# Altium PCB PUMP_MODULE_20230110.PcbDoc (part 6 of 6)
Units mm, origin at the board's own origin, x right, y up, seen from the top; angles counter-clockwise.
Board outline 260.15 x 142.01 mm, 4 copper layers (Top Layer, Mid-Layer 1, Mid-Layer 2, Bottom Layer); 422 components, 240 nets, 1746 pads, 416 vias.
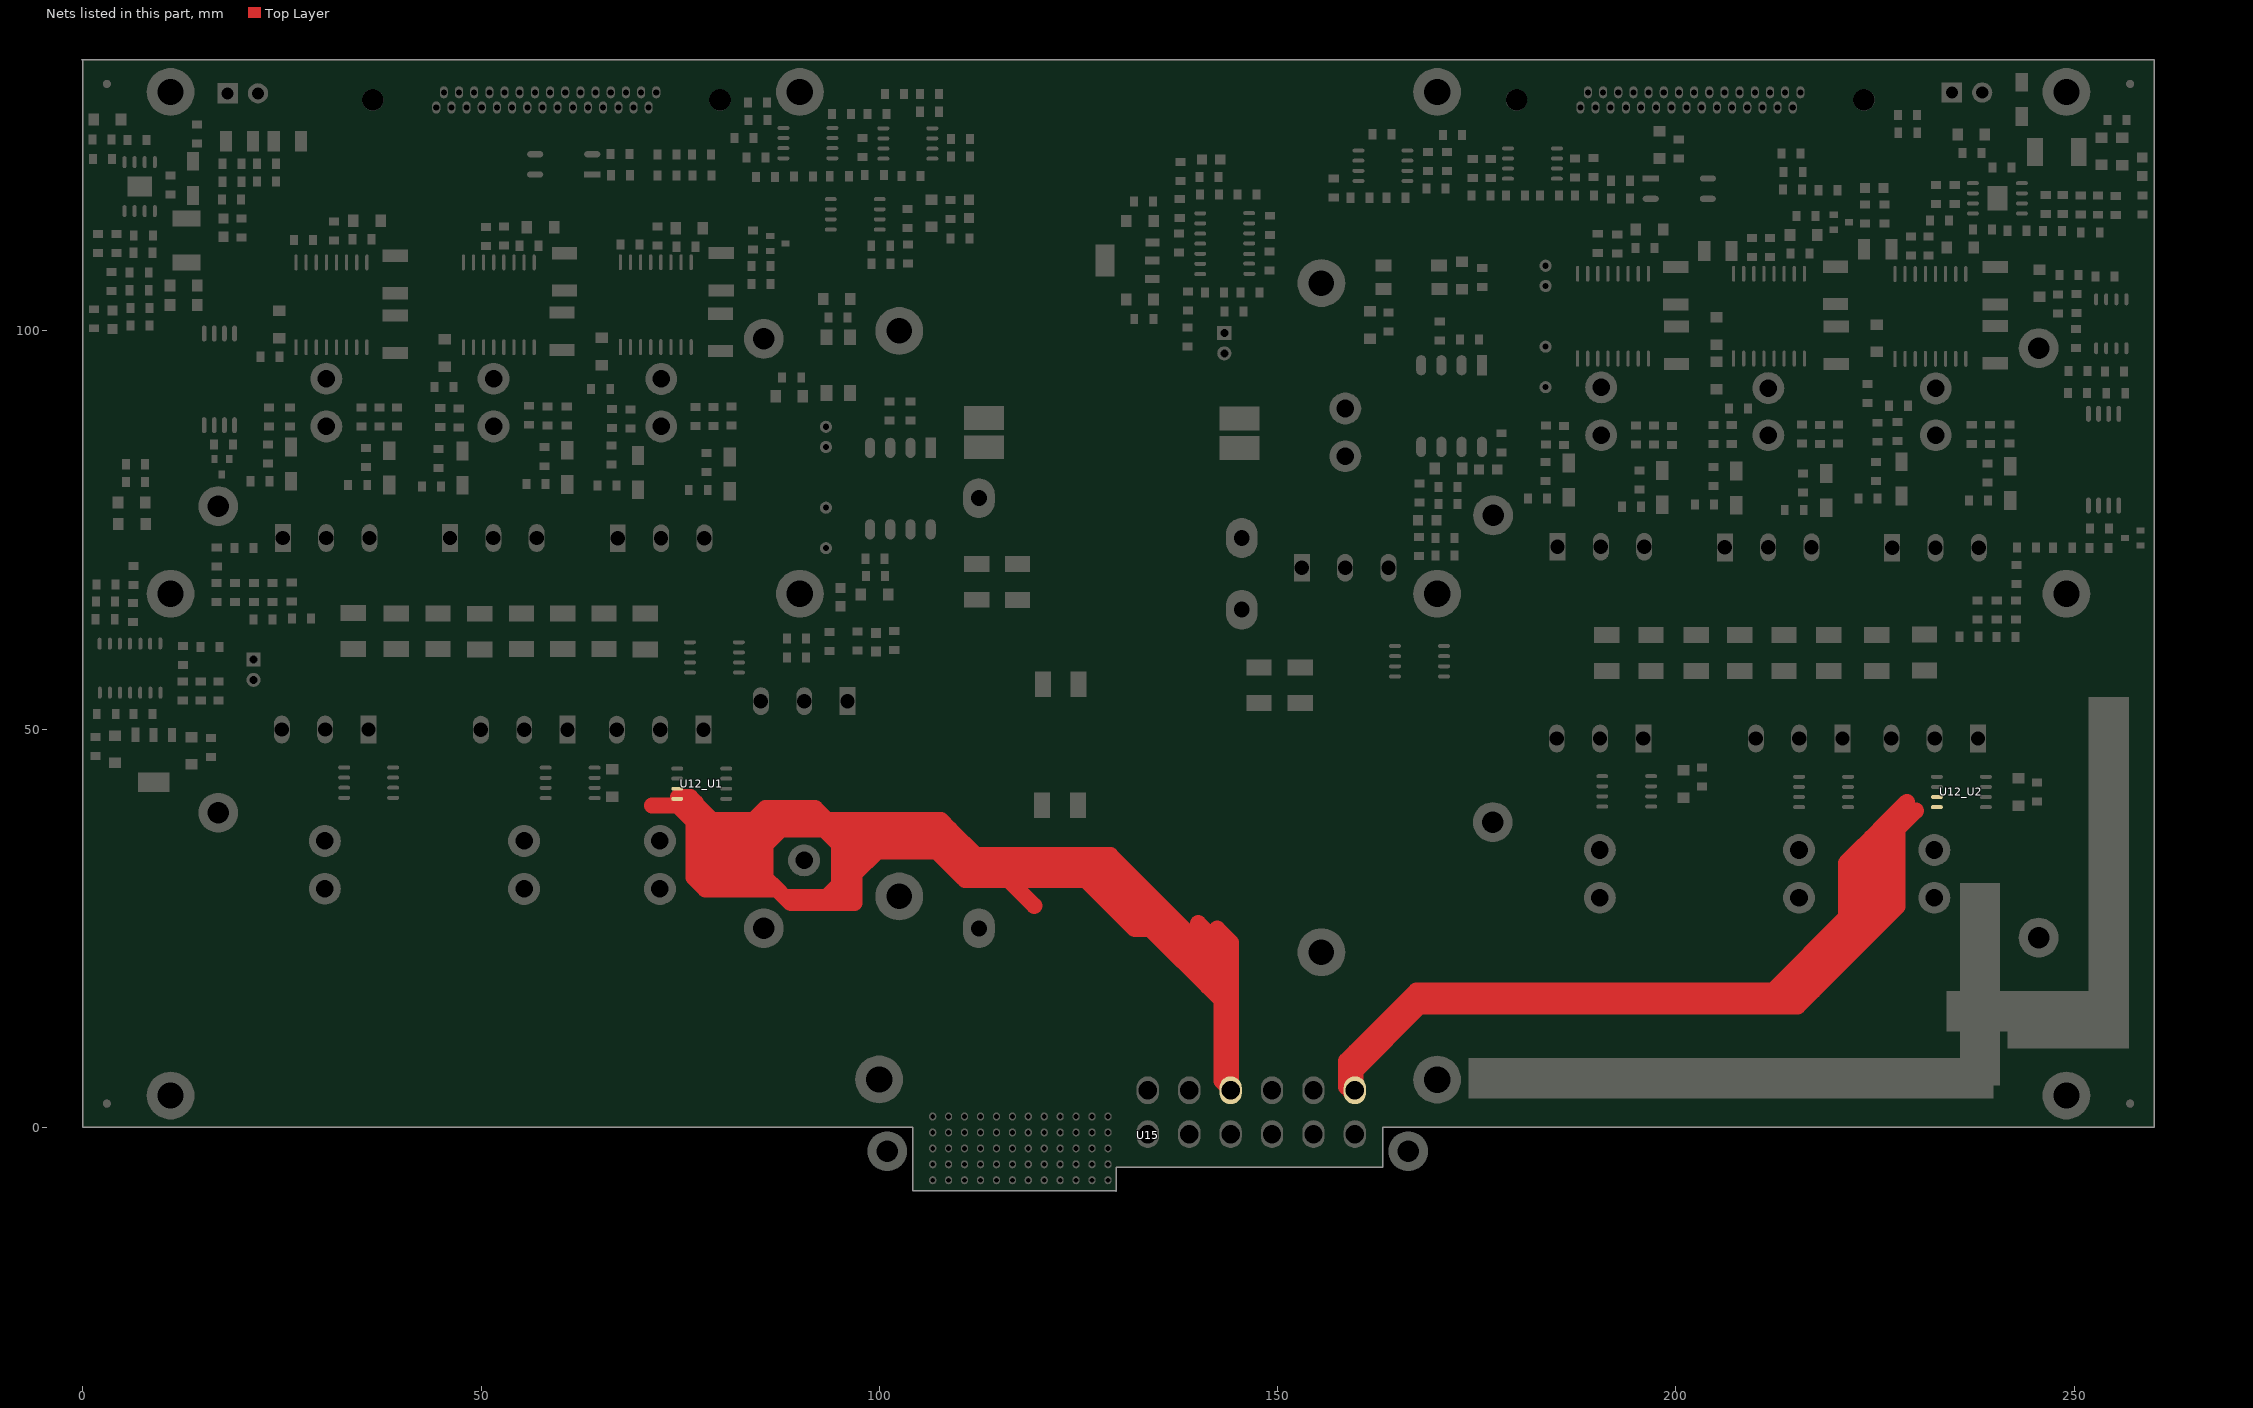
[diagram p8: the nets of this part, all layers, seen from the top]

## Via types
v1: diameter 0.762, hole 0.508, Top Layer to Bottom Layer, 208 vias
v2: diameter 2.032, hole 1.27, Top Layer to Bottom Layer, 78 vias
v3: diameter 1.27, hole 0.762, Top Layer to Bottom Layer, 61 vias
v4: diameter 1.524, hole 1.016, Top Layer to Bottom Layer, 53 vias
v5: diameter 1.27, hole 0.711, Top Layer to Bottom Layer, 16 vias

## Nets (pads, with @x,y where several pads share a name; then routed paths per layer and width w, separated by ;. In a path a pad name is that pad's centre, name@x,y a point inside that pad or via, vN(x,y) a via of type N, cw(c..) or ccw(c..) an arc to the next point about the centre after c; other vN are vias at no path point) (continued)
WW_OUT1: U12_U1.3 U12_U1.4 U15.3 | length 454.5
  Top Layer w2.032: 71.476,40.411 74.701,40.411 76.391,38.722 ; U12_U1.4@74.727,41.478 76.251,41.478 ; 76.632,38.481 77.013,38.1 ; 76.657,37.973 76.657,35.255 ; 78.232,36.881 77.013,38.1 ; 119.456,27.838 116.205,31.09 ; 126.848,34.163 128.054,32.956 ; 140.03,25.629 144.141,21.518 ; 142.418,24.943 144.141,23.219 144.141,21.518 ; 76.251,41.478 76.251,41.326 76.276,41.3 ; 76.251,41.478 76.276,41.453 ; 76.276,41.3 76.962,40.615 ; 76.276,41.3 76.276,41.453 ; 76.276,41.3 76.276,39.497 77.343,38.43 ; 76.276,41.453 76.962,40.767 76.962,40.615 ; 76.657,33.68 76.657,31.394 78.156,29.896 80.442,29.896 ; 76.657,33.68 76.657,35.255 ; 76.657,33.68 77.775,32.563 ; 76.657,35.255 77.597,34.315 84.582,34.315 85.7,35.433 ; 76.962,40.615 77.343,40.234 ; 77.013,38.1 77.343,38.43 ; 77.013,38.1 77.013,35.941 77.521,35.433 85.7,35.433 ; 77.343,38.43 77.343,39.37 ; 77.343,38.43 78.969,36.805 78.969,37.744 ; 77.343,39.37 77.343,40.234 ; 77.343,39.37 78.969,37.744 ; 77.343,40.234 79.019,38.557 84.176,38.557 ; 77.775,32.563 79.273,31.064 ; 77.775,32.563 85.115,32.563 85.7,33.147 ; 78.969,37.744 79.273,37.44 87.706,37.44 ; 79.273,31.064 80.442,29.896 ; 79.273,31.064 79.35,31.14 85.7,31.14 ; 80.442,29.896 84.607,29.896 ; 84.176,38.557 85.7,40.081 90.881,40.081 ; 84.176,38.557 92.405,38.557 ; 84.607,29.896 87.147,29.896 ; 84.607,29.896 85.776,31.064 85.7,31.14 ; 85.7,31.14 85.7,31.344 ; 85.7,31.344 87.147,29.896 ; 85.7,31.344 85.7,33.147 ; 85.7,33.147 85.7,35.433 ; 85.7,35.433 87.706,37.44 ; 87.147,29.896 88.151,28.892 ; 87.706,37.44 93.015,37.44 ; 88.151,28.892 88.875,28.169 95.275,28.169 ; 88.151,28.892 93.332,28.892 94.945,30.505 ; 90.881,40.081 91.948,40.081 93.472,38.557 ; 90.881,40.081 92.405,38.557 ; 92.405,38.557 93.472,38.557 ; 93.015,37.44 94.945,35.509 ; 93.015,37.44 108.864,37.44 ; 93.472,38.557 107.747,38.557 108.864,37.44 ; 94.945,30.505 94.945,35.509 ; 94.945,30.505 94.945,28.499 95.275,28.169 ; 94.945,35.509 99.644,35.509 ; 94.945,35.509 95.771,34.684 97.511,34.684 ; 95.275,28.169 96.876,28.169 96.876,31.775 ; 96.876,31.775 96.876,32.741 ; 96.876,31.775 99.784,34.684 ; 96.876,32.741 96.876,34.049 97.511,34.684 ; 96.876,32.741 98.819,34.684 ; 97.511,34.684 98.819,34.684 ; 98.819,34.684 99.784,34.684 ; 98.819,34.684 99.644,35.509 ; 99.644,35.509 100.571,35.509 101.397,34.684 ; 99.644,35.509 99.746,35.611 106.248,35.611 ; 99.784,34.684 101.397,34.684 ; 101.397,34.684 107.175,34.684 ; 106.248,35.611 108.458,35.611 111.303,32.766 126.162,32.766 ; 106.248,35.611 107.175,34.684 ; 107.175,34.684 110.49,31.369 ; 108.864,37.44 112.141,34.163 124.765,34.163 ; 110.49,31.369 110.769,31.09 116.205,31.09 ; 110.49,31.369 125.603,31.369 125.882,31.09 ; 116.205,31.09 125.882,31.09 ; 124.765,34.163 129.007,34.163 144.141,19.028 ; 124.765,34.163 126.162,32.766 ; 125.882,31.09 132.055,24.917 134.01,24.917 135.077,23.851 ; 126.162,32.766 135.077,23.851 ; 126.162,32.766 127.864,32.766 128.054,32.956 ; 128.054,32.956 136.601,24.409 ; 135.077,23.851 136.042,23.851 136.601,24.409 ; 135.077,23.851 141.224,17.704 ; 136.601,24.409 144.141,16.869 ; 141.224,17.704 142.977,15.951 ; 141.224,17.704 142.977,17.704 ; 142.977,7.518 142.977,15.951 ; 142.977,7.518 U15.3@144.141,6.354 ; 142.977,7.518 142.977,5.827 144.141,4.663 U15.3@144.141,6.354 ; 142.977,15.951 142.977,17.704 ; 142.977,17.704 144.141,16.539 ; U15.3@144.141,6.354 144.141,16.539 ; 144.141,16.539 144.141,16.869 ; 144.141,16.869 144.141,19.028 ; 144.141,19.028 144.141,21.518
WW_OUT2: U12_U2.3 U12_U2.4 U15.6 | length 236.1
  Top Layer w2.032: 229.006,40.869 226.416,38.278 ; 230.124,39.751 227.813,37.44 227.813,27.737 217.246,17.17 ; 159.741,7.087 159.741,9.5 ; 159.741,7.087 159.741,4.663 159.04,4.663 158.623,5.08 158.623,8.382 159.741,9.5 ; 159.741,7.087 167.869,15.215 215.29,15.215 217.246,17.17 ; 159.741,9.5 167.411,17.17 212.141,17.17 ; 212.141,17.17 214.63,17.17 ; 212.141,17.17 221.336,26.365 ; 214.63,17.17 217.246,17.17 ; 214.63,17.17 226.416,28.956 226.416,38.278 ; 221.336,26.365 221.336,33.198 222.847,34.709 ; 221.336,26.365 222.847,27.877 ; 222.847,27.877 222.847,34.709 ; 222.847,27.877 224.511,29.54 224.511,36.373 ; 222.847,34.709 224.511,36.373 ; 224.511,36.373 226.416,38.278
pads on no net: C4.0 P4_U1. P4_U1.9 P4_U1.10 P4_U1.22 P4_U1.24 P4_U1.25 P4_U2. P4_U2.9 P4_U2.10 P4_U2.22 P4_U2.24 P4_U2.25 Q1_U1. Q1_U2. Q2_U1. Q2_U2. Q3_U1. Q3_U2. Q4_U1. Q4_U2. Q5_U1. Q5_U2. Q7_U1. Q7_U2. Q8_U1. Q8_U2. U1_U1.5 U1_U1.6 U1_U1.7 U1_U2.5 U1_U2.6 U1_U2.7 U2_U1.4 U2_U2.4 U5_U1.6 U5_U2.6 U6_U1.4 U6_U1.5 U6_U1.9 U6_U1.10 U6_U1.16 U6_U2.4 U6_U2.5 U6_U2.9 U6_U2.10 U6_U2.16 U7_U1.6 U7_U2.6 U9_U1.4 U9_U1.5 U9_U1.9 U9_U1.10 U9_U1.16 U9_U2.4 U9_U2.5 U9_U2.9 U9_U2.10 U9_U2.16 U10_U1.6 U10_U2.6 U11_U1.4 U11_U1.5 U11_U1.9 U11_U1.10 U11_U1.16 U11_U2.4 U11_U2.5 U11_U2.9 U11_U2.10 U11_U2.16 U12_U1.6 U12_U2.6 U15. U15.8 U15.9 U15.10 U15.11 U15.A1 U15.A2 U15.A3 U15.A4 U15.A5 U15.A6 U15.A7 U15.A8 U15.A9 U15.A10 U15.A11 U15.A12 U15.B1 U15.B2 U15.B3 U15.B4 U15.B5 U15.B6 U15.B7 U15.B8 U15.B9 U15.B10 U15.B11 U15.B12 U15.C1 U15.C2 U15.C3 U15.C4 U15.C5 U15.C6 U15.C7 U15.C8 U15.C9 U15.C10 U15.C11 U15.C12 U15.D1 U15.D2 U15.D3 U15.D4 U15.D5 U15.D6 U15.D7 U15.D8 U15.D9 U15.D10 U15.D11 U15.D12 U15.E1 U15.E2 U15.E3 U15.E4 U15.E5 U15.E6 U15.E7 U15.E8 U15.E9 U15.E10 U15.E11 U15.E12 U17_U1.1 U17_U1.4 U17_U1.6 U17_U2.1 U17_U2.4 U17_U2.6

## Polygon pours and split planes (outlines as drawn)
AGND_U2 on Bottom Layer "Top Layer-No Net" (solid, remove dead copper, pour order 18): 128.448,133.985 127.61,133.147 127.61,101.422 146.558,101.422 150.012,104.877 150.012,107.188 150.012,114.859 149.098,115.773 190.5,115.773 190.729,116.002 190.881,115.849 195.478,115.849 197.637,115.849 197.79,115.697 197.714,115.773 197.714,133.909 175.59,133.909 175.514,133.833 175.438,133.909 174.904,133.909 174.904,126.441 174.447,125.984 174.219,125.755 165.837,125.755 165.837,125.781 164.846,126.771 164.541,127.076 164.541,133.909 127.701,133.909 127.61,134 127.635,133.975 127.635,133.02
AGND_U1 on Bottom Layer "Top Layer-No Net" (solid, remove dead copper, pour order 13): 65.43,133.794 65.481,133.744 65.481,118.377 91.389,118.377 93.523,116.243 93.65,116.116 93.65,112.281 112.166,112.281 112.395,112.509 112.395,133.794 93.802,133.794 93.98,133.617 93.98,126.047 85.852,126.047 85.801,125.997 85.446,126.352 85.446,133.896 65.43,133.896
+5VA_U2 on Mid-Layer 2 "Top Layer-No Net" (solid, remove dead copper, pour order 17): 128.549,133.782 127.711,132.944 127.711,101.219 146.66,101.219 150.114,104.673 150.114,106.985 150.114,114.656 149.2,115.57 190.602,115.57 190.83,115.799 190.983,115.646 195.58,115.646 197.739,115.646 197.891,115.494 197.815,115.57 197.815,133.706 175.692,133.706 175.616,133.629 175.539,133.706 175.006,133.706 175.006,126.238 174.549,125.781 174.32,125.552 165.938,125.552 165.938,125.578 164.948,126.568 164.643,126.873 164.643,133.706 127.802,133.706 127.711,133.797 127.737,133.771 127.737,132.817
+5VA_U1 on Mid-Layer 2 "Top Layer-No Net" (solid, remove dead copper, pour order 12): 65.507,133.909 65.557,133.858 65.557,118.491 91.465,118.491 93.599,116.357 93.726,116.23 93.726,112.395 112.243,112.395 112.471,112.624 112.471,133.909 93.878,133.909 94.056,133.731 94.056,126.162 85.928,126.162 85.877,126.111 85.522,126.467 85.522,134.01 65.507,134.01
AGND_U2 on Top Layer "Top Layer-No Net" (solid, remove dead copper, pour order 16): 128.448,133.883 127.61,133.045 127.61,101.321 146.558,101.321 150.012,104.775 150.012,107.086 150.012,114.757 149.098,115.672 190.5,115.672 190.729,115.9 190.881,115.748 195.478,115.748 197.637,115.748 197.79,115.595 197.714,115.672 197.714,133.807 175.59,133.807 175.514,133.731 175.438,133.807 174.904,133.807 174.904,126.34 174.447,125.882 174.219,125.654 165.837,125.654 165.837,125.679 164.846,126.67 164.541,126.975 164.541,133.807 127.701,133.807 127.61,133.898 127.635,133.873 127.635,132.918
AGND_U1 on Top Layer "Top Layer-No Net" (solid, remove dead copper, pour order 11): 65.507,134.087 65.557,134.036 65.557,118.669 91.465,118.669 93.599,116.535 93.726,116.408 93.726,112.573 112.243,112.573 112.471,112.801 112.471,134.087 93.878,134.087 94.056,133.909 94.056,126.34 85.928,126.34 85.877,126.289 85.522,126.644 85.522,134.188 65.507,134.188
AGND_U2 on Mid-Layer 1 "Top Layer-No Net" (solid, remove dead copper, pour order 15): 128.448,134 127.61,133.162 127.61,101.437 146.558,101.437 150.012,104.892 150.012,107.203 150.012,114.874 149.098,115.788 190.5,115.788 190.729,116.017 190.881,115.864 195.478,115.864 197.637,115.864 197.79,115.712 197.714,115.788 197.714,133.924 175.59,133.924 175.514,133.848 175.438,133.924 174.904,133.924 174.904,126.456 174.447,125.999 174.219,125.77 165.837,125.77 165.837,125.796 164.846,126.786 164.541,127.091 164.541,133.924 127.701,133.924 127.61,134.015 127.635,133.99 127.635,133.035
AGND_U2 on Mid-Layer 1 "Top Layer-No Net" (solid, remove dead copper, pour order 14): 249.276,108.788 249.276,88.621 250.292,87.605 250.317,87.579 256.261,87.579 256.261,106.959 254.864,108.356 254.533,108.687 249.326,108.687
AGND_U1 on Mid-Layer 1 "Top Layer-No Net" (solid, remove dead copper, pour order 10): 65.456,133.909 65.507,133.858 65.507,118.491 91.415,118.491 93.548,116.357 93.675,116.23 93.675,112.395 112.192,112.395 112.42,112.624 112.42,133.909 93.828,133.909 94.005,133.731 94.005,126.162 85.877,126.162 85.827,126.111 85.471,126.467 85.471,134.01 65.456,134.01

## Keep-outs
Keep-Out Layer:
  lines w0.254: 0.023,3 ccw(c3.023,3) 3.023,0 92.475,0 92.475,2.525 104.175,2.525 104.175,0.025 104.175,-7.976 129.675,-7.976 129.675,-4.975 ; 0.025,3 0.025,130.988 cw(c3.025,130.988) 3.025,133.988 ; 3.025,134 257.023,134 ; 104.225,-8.001 129.725,-8.001 129.725,-5 ; 129.667,-4.975 163.175,-4.975 ; 129.718,-5 163.149,-5 163.175,-4.975 ; 176.113,2.525 176.175,2.464 ; 176.149,0 257.023,0 ccw(c257.023,3) 260.023,3 ; 176.175,0.025 176.175,2.525 163.175,2.525 163.175,-4.975 ; 257.023,134.01 cw(c257.023,131.01) 260.023,131.01 260.023,2.972

## Other copper
Top Layer:
  rectangle net PGND: 17.323,2.261 24.587,34.95
  rectangle net PGND: 20.625,20.371 24.587,52.019
  rectangle net PGND: 43.663,48.184 51.054,56.261
  rectangle net PGND: 64.567,48.158 68.351,56.007
  rectangle net PGND: 26.746,53.67 45.136,59.411
  rectangle net WW_OUT1: 117.5,23.876 143.942,33.198
  rectangle net VV_OUT1: 58.75,16.891 75.59,25.806
  rectangle net UU_OUT1: 36.957,2.108 90.627,13.437
  rectangle net UU_OUT1: 33.985,2.032 39.345,16.434
  rectangle net PGND: 176.911,0.406 240.894,11.633
  rectangle net PGND: 42.697,20.142 51.308,30.582
  rectangle net PGND: 174.422,3.759 178.765,10.77
  rectangle net ISO_GND_U2: 165.964,101.219 186.512,103.429
  rectangle net ISO_GND_U2: 149.225,96.266 166.472,100.33
  rectangle net ISO_GND_U2: 142.164,87.478 149.962,94.107
  rectangle net ISO_GND_U1: 42.342,114.656 46.05,123.469
  rectangle net ISO_GND_U1: 110.261,87.706 116.103,96.215
  rectangle net ISO_GND_U1: 98.628,90.322 102.159,96.241
  rectangle net ISO_GND_U1: 98.628,92.507 116.053,96.241
  rectangle net PGND: 253.416,57.404 259.004,72.796
  rectangle net ISO_+15V_U2: 197.561,105.512 204.241,110.693
  rectangle net ISO_+15V_U2: 216.891,106.172 222.936,110.922
  rectangle net NetC13_U2_1: 242.164,118.262 246.075,126.238
  rectangle net ISO_+15V_U2: 229.768,121.615 235.915,131.369
  rectangle net ISO_+15V_U2: 236.855,105.893 241.554,110.592
  rectangle net PGND: 0.762,116.434 8.763,119.659
  rectangle net ISO_+5V_U1: 7.722,99.543 12.217,108.026
  rectangle net NetC13_U1_1: 10.389,113.081 14.757,117.526
  rectangle net NetC13_U1_1: 8.738,113.055 14.757,116.027
  rectangle net ISO_+15V_U1: 77.14,107.29 81.864,112.903
  rectangle net ISO_+15V_U1: 57.277,107.036 61.976,112.268
  rectangle net ISO_+15V_U1: 36.246,107.112 40.996,112.319
  rectangle net NetC36_U1_1: 89.611,87.097 94.183,93.243
  rectangle net HVCC_IN: 108.204,45.161 121.539,66.04
  rectangle net PGND: 146.99,36.195 172.695,45.212
  rectangle net PGND: 133.655,36.246 155.753,53.721
  rectangle net PGND: 123.749,38.608 140.792,81.483
  rectangle net PGND: 110.617,70.663 148.057,86.843
  rectangle net PGND: 236.83,52.146 250.038,54.788
  rectangle net PGND: 236.982,27.559 253.263,36.881
  rectangle net PGND: 235.966,15.697 241.478,30.912
  rectangle net PGND: 249.657,10.414 258.953,31.115
  rectangle net PGND: 233.35,8.738 259.004,19.583
  rectangle net PGND: 248.539,27.559 259.004,58.344
  rectangle net PGND: 227.762,0.432 242.849,18.263
  rectangle net PGND: 189.89,52.172 258.42,58.42
  rectangle net HVCC_U2: 176.962,57.963 182.296,60.731
  rectangle net HVCC_U2: 176.428,59.106 185.623,64.821
  rectangle net PGND: 173.888,9.144 184.226,11.582
  rectangle net HVCC_U2: 175.997,60.528 236.144,68.25
  rectangle net U_OUT_U2: 186.842,42.494 192.075,45.618
  rectangle net UU_OUT2: 186.817,38.227 193.015,41.986
  rectangle net VV_OUT2: 211.76,38.125 217.17,41.885
  rectangle net V_OUT_U2: 210.49,42.393 217.018,45.517
  rectangle net WW_OUT2: 228.625,38.252 234.264,41.935
  rectangle net W_OUT_U2: 229.489,42.393 234.417,45.466
  rectangle net PGND: 42.672,24.181 49.073,56.261
  rectangle net PGND: 32.309,54.788 73.025,61.163
  rectangle net HVCC_IN: 100.508,41.605 121.539,56.337
  rectangle net HVCC_U1: 28.092,63.195 85.674,69.825
  rectangle net HVCC_U1: 80.645,59.284 85.725,66.573
  rectangle net HVCCIN_U1: 80.747,51.689 87.147,58.75
  rectangle net UU_OUT1: 27.051,39.319 34.366,43.129
  rectangle net U_OUT_U1: 26.949,43.459 34.163,46.584
  rectangle net VV_OUT1: 52.172,39.141 58.979,42.951
  rectangle net V_OUT_U1: 52.172,43.205 58.979,46.533
  rectangle net WW_OUT1: 69.367,39.218 75.997,42.951
  rectangle net W_OUT_U1: 69.418,43.51 75.997,46.939
  rectangle net UU_OUT1: 27.051,2.032 39.345,26.391
Mid-Layer 1:
  rectangle net PGND: 177.851,0.711 241.63,10.897
  rectangle net PGND: 174.015,3.581 241.554,11.455
Mid-Layer 2:
  rectangle net PGND: 176.987,0.559 241.503,11.176
  rectangle net PGND: 174.092,3.581 241.554,11.455
Bottom Layer:
  rectangle net AGND_U1: 1.829,34.722 12.929,46.025
  rectangle net AGND_U1: 0.533,34.722 3.48,70.46
  rectangle net AGND_U1: 0.533,70.206 5.715,93.142
  rectangle net HVCC_IN: 144.526,50.65 157.609,62.281
  rectangle net PGND: 203.429,20.142 211.023,50.673
  rectangle net PGND: 223.723,47.117 228.092,68.199
  rectangle net PGND: 222.148,53.797 224.409,79.832
  rectangle net PGND: 62.636,60.096 65.913,69.825
  rectangle net PGND: 42.418,48.514 45.669,69.926
  rectangle net PGND: 17.323,1.702 47.981,26.492
  rectangle net PGND: 61.9,60.173 64.567,81.661
  rectangle net PGND: 40.615,48.514 43.409,81.077
  rectangle net V_OUT_U1: 52.426,47.879 58.166,69.494
  rectangle net PGND: 177.038,0.559 242.722,12.065
  rectangle net PGND: 236.931,27.61 242.672,36.22
  rectangle net PGND: 220.777,23.368 228.854,37.414
  rectangle net ISO_GND_U2: 185.395,101.092 189.484,103.734
  rectangle net ISO_GND_U1: 41.377,108.407 47.168,113.106
  rectangle net ISO_GND_U1: 33.147,105.969 47.142,110.465
  rectangle net ISO_GND_U1: 57.836,105.639 69.215,110.388
  rectangle net ISO_GND_U1: 84.455,102.616 87.147,107.569
  rectangle net ISO_GND_U1: 76.327,104.877 83.109,109.931
  rectangle net ISO_GND_U1: 81.813,104.953 86.893,109.525
  rectangle net ISO_GND_U1: 71.882,105.918 83.058,111.15
  rectangle net ISO_GND_U1: 54.407,105.689 59.207,110.871
  rectangle net ISO_GND_U1: 30.48,104.902 82.677,107.29
  rectangle net PGND: 79.07,81.001 81.407,85.446
  rectangle net PGND: 75.895,81.509 81.432,99.644
  rectangle net PGND: 54.915,83.033 69.088,98.45
  rectangle net PGND: 33.985,81.229 48.108,98.298
  rectangle net PGND: 23.876,82.271 27.407,97.231
  rectangle net PGND: 21.057,80.95 81.432,85.115
  rectangle net PGND: 26.949,97.104 81.382,99.847
  rectangle net PGND: 3.683,101.346 9.042,106.045
  rectangle net PGND: 0.584,102.794 3.785,117.043
  rectangle net PGND: 6.299,105.613 14.707,118.212
  rectangle net PGND: 0.559,96.749 5.944,106.121
  rectangle net PGND: 228.27,80.01 240.97,82.245
  rectangle net PGND: 202.235,78.969 225.374,81.102
  rectangle net PGND: 187.325,79.35 204.064,81.737
  rectangle net PGND: 215.544,82.372 228.549,98.679
  rectangle net PGND: 194.615,81.356 207.797,98.044
  rectangle net PGND: 180.95,79.985 240.513,84.125
  rectangle net PGND: 252.654,111.328 257.175,117.602
  rectangle net PGND: 248.793,120.599 259.055,125.552
  rectangle net PGND: 238.658,113.36 254.102,125.451
  rectangle net PGND: 244.348,70.282 246.38,81.128
  rectangle net PGND: 238.074,80.035 246.38,93.802
  rectangle net PGND: 242.773,54.762 244.983,92.761
  rectangle net PGND: 243.383,54.712 246.431,62.84
  rectangle net PGND: 106.121,33.68 115.926,72.212
  rectangle net PGND: 0.737,116.434 14.63,124.333
  rectangle net PGND: 69.444,4.318 91.77,20.904
  rectangle net PGND: 89.332,10.236 97.942,28.245
  rectangle net PGND: 42.266,1.702 80.62,25.781
  rectangle net PGND: 242.672,27.61 256.464,36.195
  rectangle net PGND: 249.707,8.814 258.877,36.195
  rectangle net PGND: 228.778,8.814 258.877,19.583
  rectangle net PGND: 152.07,27.051 172.644,45.161
  rectangle net PGND: 160.401,9.881 174.828,33.604
  rectangle net PGND: 174.015,3.81 241.427,25.324
  rectangle net W_OUT_U2: 230.124,46.761 235.306,51.537
  rectangle net V_OUT_U2: 213.563,46.965 217.881,52.324
  rectangle net U_OUT_U2: 187.935,47.015 192.634,51.689
  rectangle net PGND: 96.774,33.706 113.335,43.561
  rectangle net PGND: 106.096,70.637 148.438,86.716
  rectangle net U_OUT_U1: 28.194,47.777 32.715,52.705
  rectangle net V_OUT_U1: 53.086,47.981 57.785,52.934
  rectangle net W_OUT_U1: 70.028,47.93 75.006,53.95
  rectangle net HVCC_IN: 119.075,10.389 148.565,67.539
  rectangle net HVCC_IN: 110.49,2.997 129.184,29.261
  rectangle net PGND: 17.323,17.069 24.562,31.877
  rectangle net PGND: 93.828,25.654 97.866,36.5
  rectangle net PGND: 188.798,95.885 241.579,99.035
  rectangle net PGND: 236.245,82.423 241.579,97.307

## Text inside footprints (layer, text, board x,y; h text height)
U15: Top Overlay "A" at 104.877,-6.841 h1; Top Overlay "B" at 104.801,-4.936 h1; Top Overlay "C" at 104.801,-3.006 h1; Top Overlay "D" at 104.851,-1.101 h1; Top Overlay "E" at 104.877,0.931 h1